# EAGLE board nixie - final (EAGLE 7.7.0)
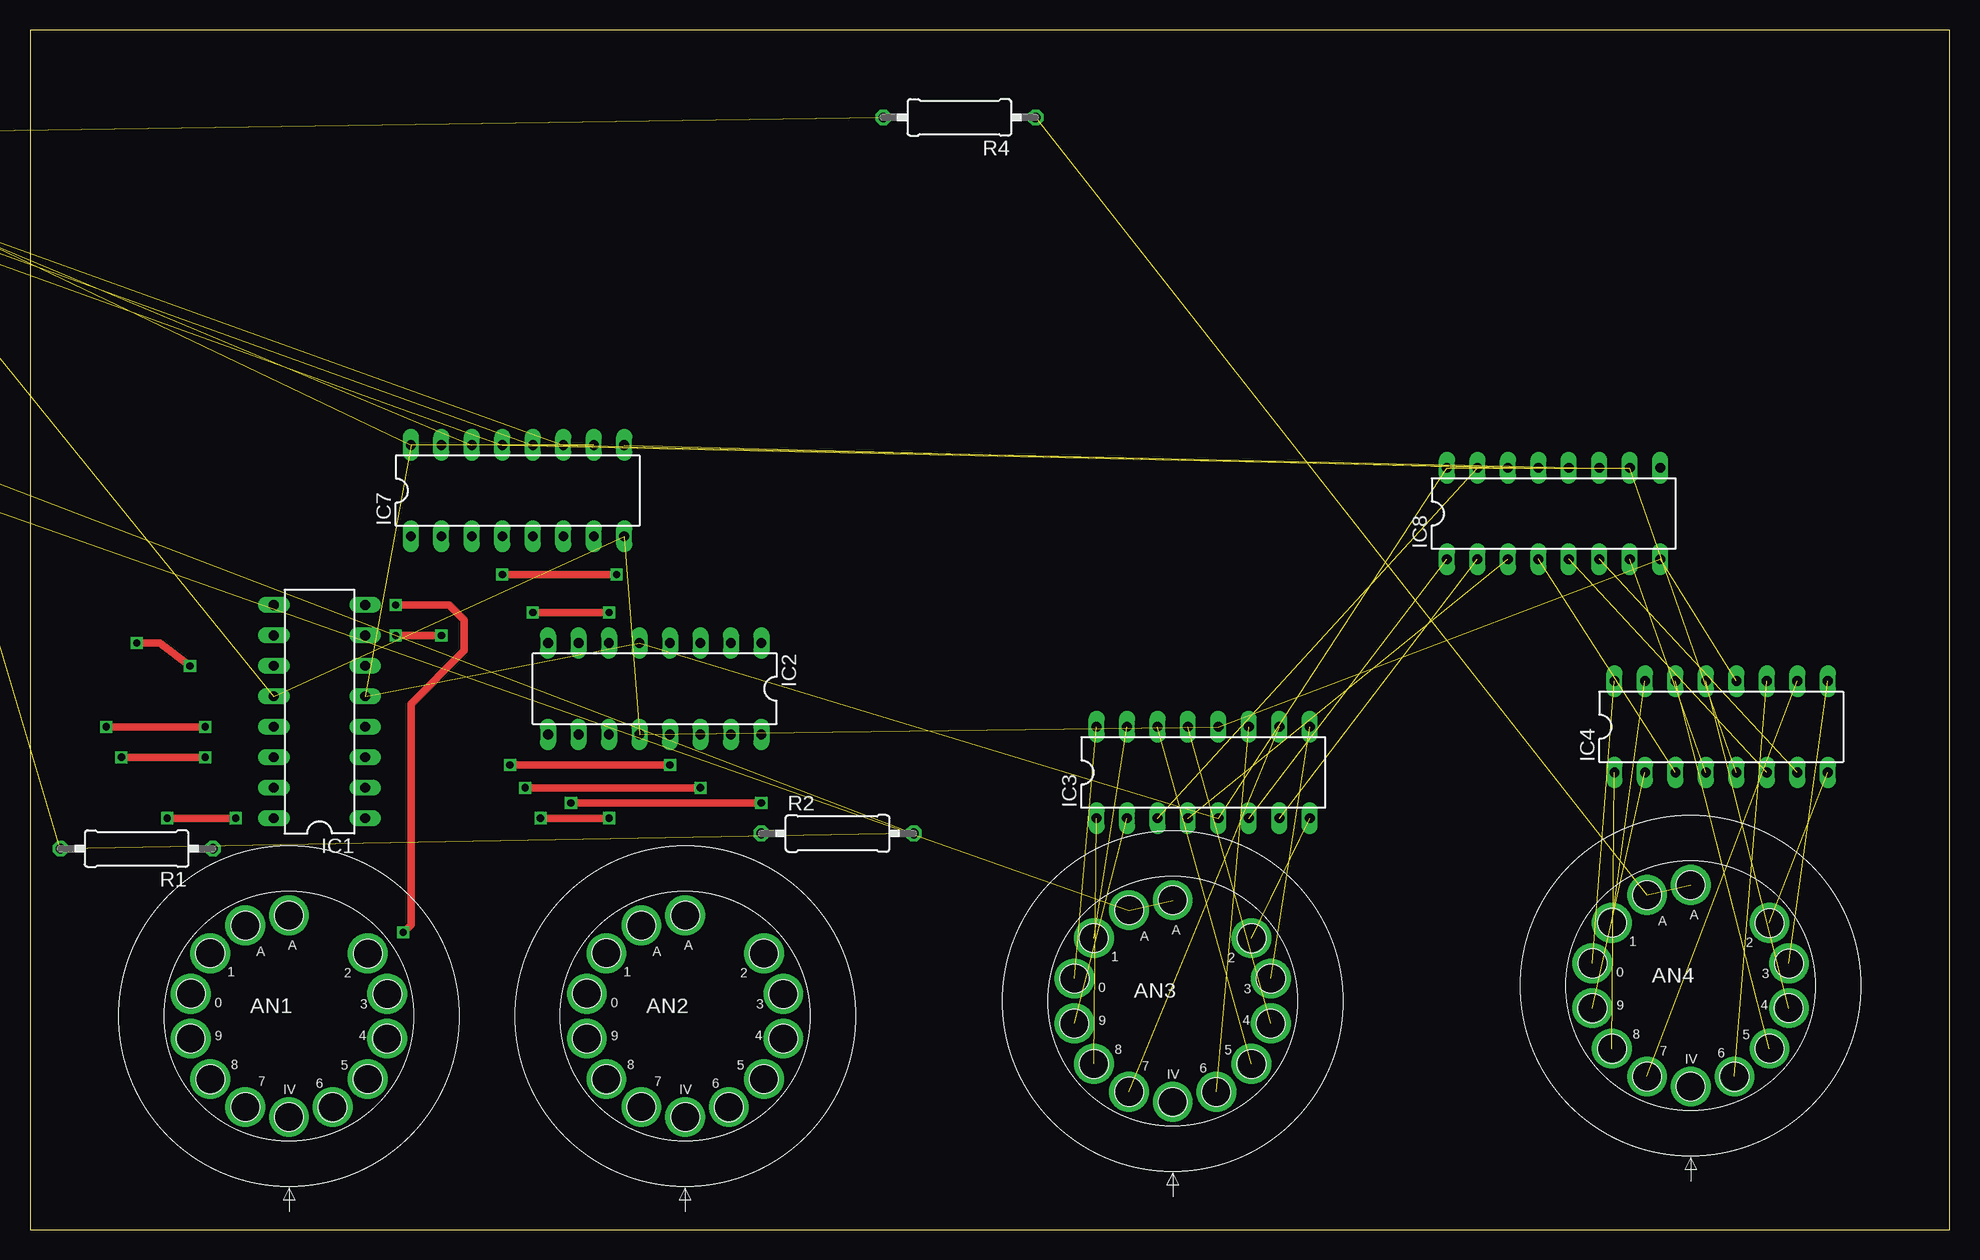
[diagram p0: board, top side]
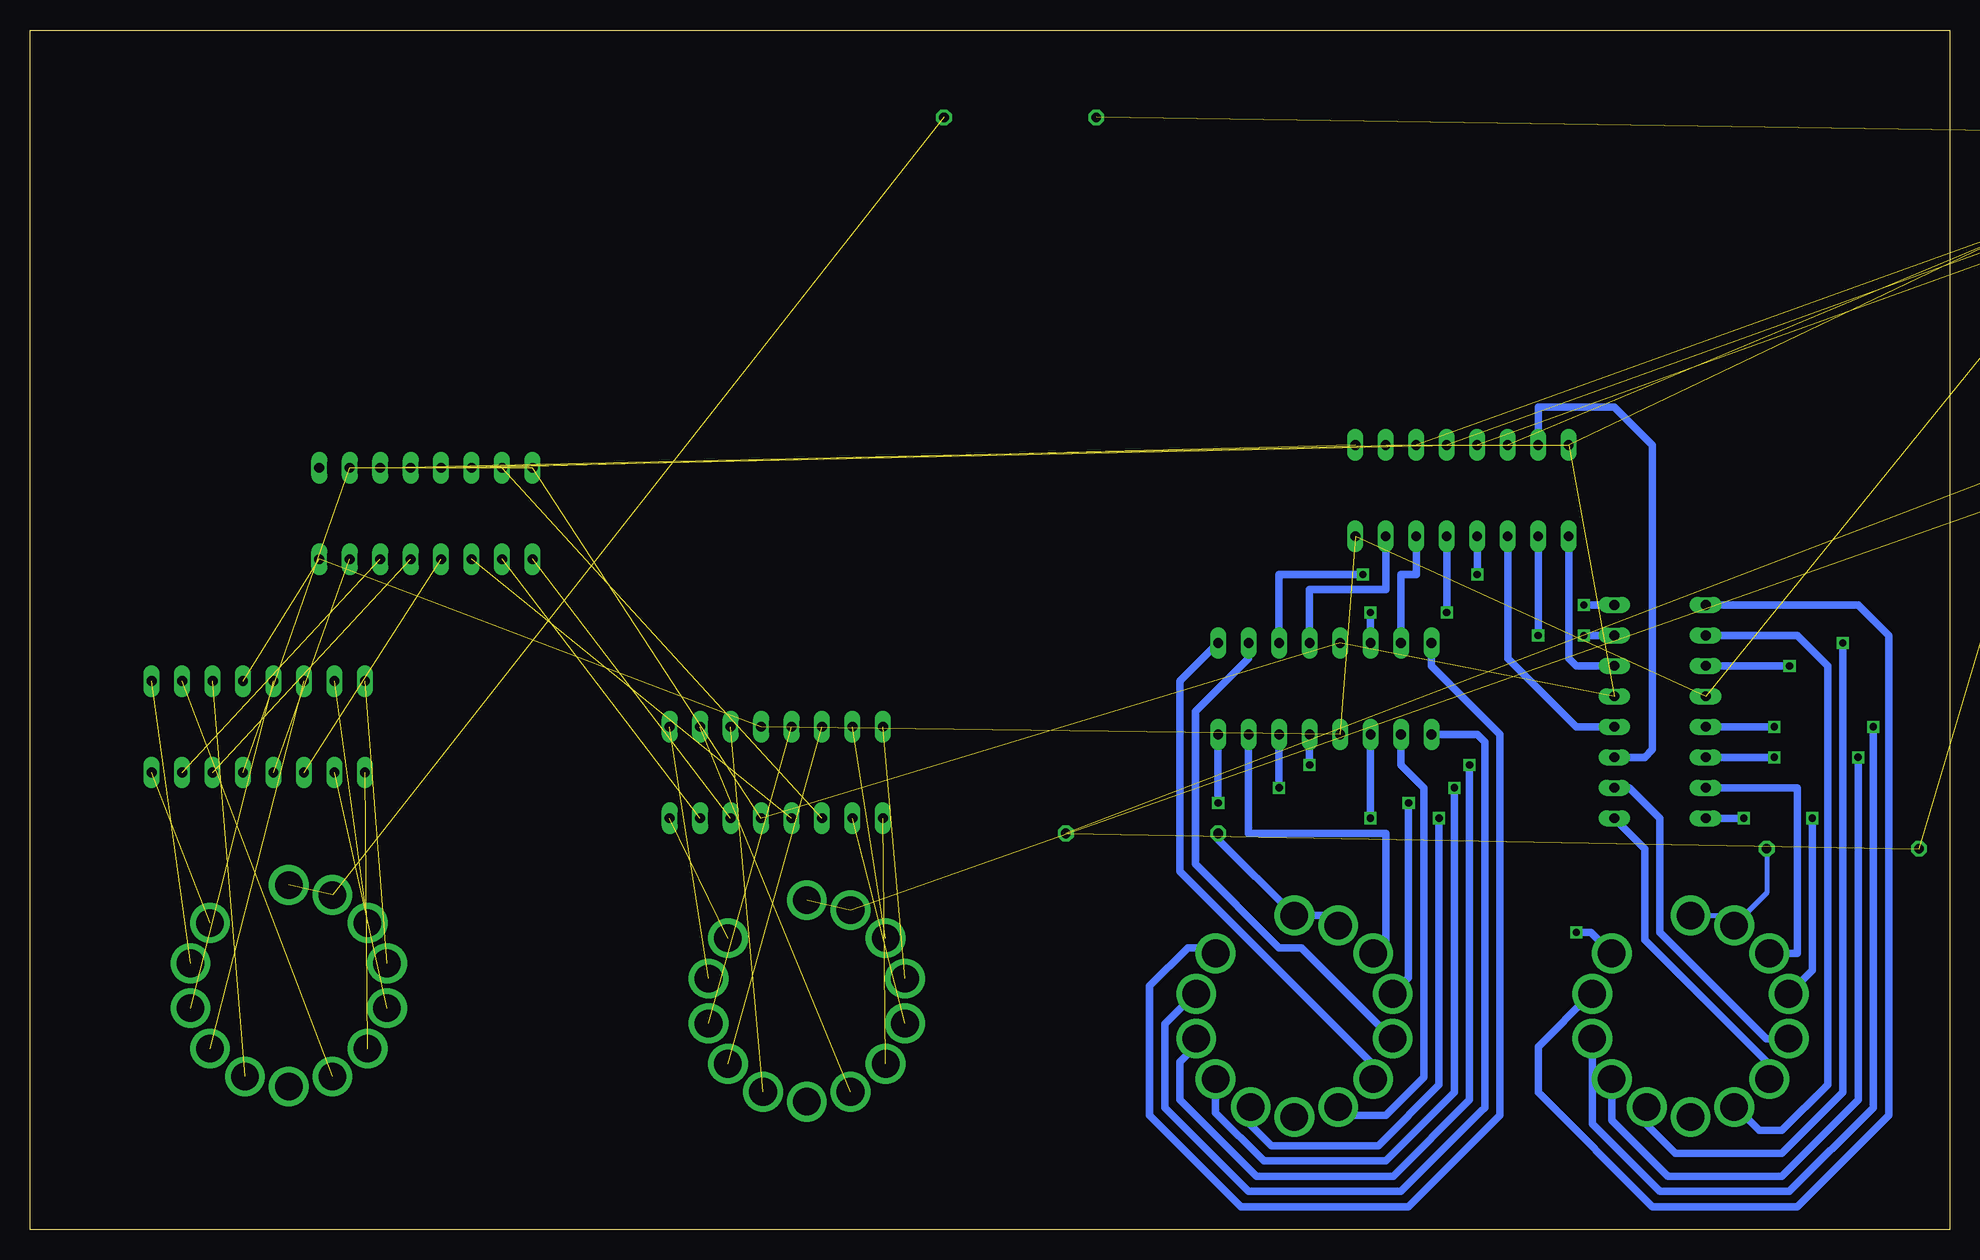
[diagram p1: board, bottom side, seen from below]

Size 160 x 100 mm. Coordinates in mm from the lower left corner, seen from the top.
Outline: 0,0 160,0 160,100 0,100 0,0
Copper layers (1*16): Top 0.035mm / dielectric 1.5mm / Bottom 0.035mm
Design rules "default": minimum track width 10mil, minimum drill 24mil, track to track 8mil, track to pad 8mil, pad to pad 8mil, via to via 8mil, smd to smd 8mil, copper to edge 40mil, drill to drill 8mil, minimum pad ring 10mil, minimum via ring 8mil, stop-mask expansion 4mil, vias tented up to drill 0mil, thermal gap 10mil

## Footprints (pad centres in the part's own frame; a part is rotated, then mirrored left to right if it is on the bottom)
ZM1042-AMP = drill 2.3 pad 3.2: 0 -8.189,1.869; 1 -6.567,5.237; 2 6.567,5.237; 3 8.189,1.869; 4 8.189,-1.869; 5 6.567,-5.237; 6 3.645,-7.568; 7 -3.645,-7.568; 8 -6.567,-5.237; 9 -8.189,-1.869; A 0,8.4; A1 -3.645,7.568; IV 0,-8.4
DIL16 = drill 0.813 long: 1 -8.89,-3.81; 2 -6.35,-3.81; 3 -3.81,-3.81; 4 -1.27,-3.81; 5 1.27,-3.81; 6 3.81,-3.81; 7 6.35,-3.81; 8 8.89,-3.81; 9 8.89,3.81; 10 6.35,3.81; 11 3.81,3.81; 12 1.27,3.81; 13 -1.27,3.81; 14 -3.81,3.81; 15 -6.35,3.81; 16 -8.89,3.81
LED_LD260 = drill 0.813 octagon: A -1.27,0; K 1.27,0
0309/12 = drill 0.813 octagon: 1 -6.35,0; 2 6.35,0
MA10-1 = drill 1.016 long: 1 -11.43,0; 2 -8.89,0; 3 -6.35,0; 4 -3.81,0; 5 -1.27,0; 6 1.27,0; 7 3.81,0; 8 6.35,0; 9 8.89,0; 10 11.43,0

## Placement (x,y rotation side)
AN1  ZM1042-1-380758-1  [ZM1042-AMP]  21.59,17.78 0 top
AN2  ZM1042-1-380758-1  [ZM1042-AMP]  54.61,17.78 0 top
AN3  ZM1042-1-380758-1  [ZM1042-AMP]  95.25,19.05 0 top
AN4  ZM1042-1-380758-1  [ZM1042-AMP]  138.43,20.32 0 top
IC1  74141N  [DIL16]  24.13,43.18 90 top
IC2  74141N  [DIL16]  52.07,45.09 180 top
IC3  74141N  [DIL16]  97.79,38.1 0 top
IC4  74141N  [DIL16]  140.97,41.91 0 top
IC7  74HC595N  [DIL16]  40.64,61.59 0 top
IC8  74HC595N  [DIL16]  127,59.69 0 top
LED1  [LED_LD260]  -30.48,96.52 0 top  (outside the outline)
LED2  [LED_LD260]  -35.56,96.52 0 top  (outside the outline)
R1  27k  [0309/12]  8.89,31.75 180 top
R2  27k  [0309/12]  67.31,33.02 0 top
R3  27k  [0309/12]  -78.74,88.9 0 top  (outside the outline)
R4  27k  [0309/12]  77.47,92.71 180 top
SV1  [MA10-1]  -26.67,91.44 0 top  (outside the outline)

## Library data of the parts
AN1-AN4 = nixie_tube
IC1-IC4 IC7 IC8 = 74xx-eu
LED1 LED2 = eagle-ltspice; SPICEMODEL: NONE; SPICEPREFIX: D; SPICETYPE: diode
R1-R4 = resistor
SV1 = con-lstb; OC_FARNELL: unknown; OC_NEWARK: unknown

## Nets
230V=: R1.2 R2.2 R3.2 R4.2 SV1.10
GND: IC1.12 IC2.12 IC3.12 IC4.12 IC7.8 IC8.8 LED1.K LED2.K SV1.8 SV1.9
LED1: LED2.A SV1.1
LED2: LED1.A SV1.2
N$1: AN1.0 IC1.16
N$2: AN1.1 IC1.15
N$3: AN1.2 IC1.8
N$4: AN1.3 IC1.9
N$5: AN1.4 IC1.13
N$6: AN1.5 IC1.14
N$7: AN1.6 IC1.11
N$8: AN1.7 IC1.10
N$9: AN1.8 IC1.1
N$10: AN1.9 IC1.2
N$11: AN4.1 IC4.15
N$12: AN4.2 IC4.8
N$13: AN4.4 IC4.13
N$14: AN4.3 IC4.9
N$15: AN4.5 IC4.14
N$16: AN4.6 IC4.11
N$17: AN4.7 IC4.10
N$18: AN4.8 IC4.1
N$19: AN4.9 IC4.2
N$20: AN4.0 IC4.16
N$21: AN3.1 IC3.15
N$22: AN3.2 IC3.8
N$23: AN3.4 IC3.13
N$24: AN3.3 IC3.9
N$25: AN3.5 IC3.14
N$26: AN3.6 IC3.11
N$27: AN3.7 IC3.10
N$28: AN3.8 IC3.1
N$29: AN3.9 IC3.2
N$30: AN3.0 IC3.16
N$31: AN2.1 IC2.15
N$32: AN2.2 IC2.8
N$33: AN2.4 IC2.13
N$34: AN2.3 IC2.9
N$35: AN2.5 IC2.14
N$36: AN2.6 IC2.11
N$37: AN2.7 IC2.10
N$38: AN2.8 IC2.1
N$39: AN2.9 IC2.2
N$40: AN2.0 IC2.16
N$61: IC1.3 IC7.15
N$62: IC1.6 IC7.1
N$63: IC1.7 IC7.2
N$64: IC1.4 IC7.3
N$65: IC2.3 IC7.4
N$66: IC2.6 IC7.5
N$67: IC2.7 IC7.6
N$68: IC2.4 IC7.7
N$69: IC3.3 IC8.15
N$70: IC3.6 IC8.1
N$71: IC3.7 IC8.2
N$72: IC3.4 IC8.3
N$73: IC4.3 IC8.4
N$74: IC4.6 IC8.5
N$75: IC4.7 IC8.6
N$76: IC4.4 IC8.7
N$85: IC7.9 IC8.14
N$89: AN1.A AN1.A1 R1.1
N$90: AN2.A AN2.A1 R2.1
N$91: AN3.A AN3.A1 R3.1
N$92: AN4.A AN4.A1 R4.1
OUTPUT_ON(LOW): IC7.13 IC8.13 SV1.3
REGISTER_WRITE: IC7.12 IC8.12 SV1.4
SERIAL_IN: IC7.14 SV1.6
SERIAL_MOVE_CLOCK: IC7.11 IC8.11 SV1.5
VCC: IC1.5 IC2.5 IC3.5 IC4.5 IC7.10 IC7.16 IC8.10 IC8.16 SV1.7

## Tracks (layer width: path | path; a pad name or v marks a point on that pad's centre or on a via)
230V=  (4 unrouted)
GND  (9 unrouted)
LED1  (1 unrouted)
LED2  (1 unrouted)
N$1  (via drill 0.6)
  Top 0.61: v11.43,34.29 v17.14,34.29
  Bottom 0.61: AN1.0 11.43,21.62 v11.43,34.29 | v17.14,34.29 IC1.16
N$2
  Bottom 0.61: AN1.1 12.7,23.02 12.7,36.83 IC1.15
N$3  (via drill 0.6)
  Top 0.61: v30.48,52.07 34.92,52.07 36.2,50.8 36.2,48.26 31.75,43.81 31.75,25.4 v31.11,24.77
  Bottom 0.61: IC1.8 v30.48,52.07 | v31.11,24.77 29.91,24.77 AN1.2
N$4
  Bottom 0.61: AN1.3 29.88,19.65 34.29,15.24 34.29,11.43 24.77,1.91 12.7,1.91 5.08,9.53 5.08,49.53 7.62,52.07 IC1.9
N$5  (via drill 0.6)
  Top 0.61: v6.35,41.91 v14.61,41.91
  Bottom 0.61: AN1.4 29.78,8.82 24.13,3.17 13.34,3.17 6.35,10.16 v6.35,41.91 | v14.61,41.91 IC1.13
N$6  (via drill 0.6)
  Top 0.61: v7.62,39.37 v14.61,39.37
  Bottom 0.61: AN1.5 28.16,9.11 23.5,4.45 13.97,4.45 7.62,10.79 v7.62,39.37 | v14.61,39.37 IC1.14
N$7  (via drill 0.6)
  Top 0.61: v8.89,48.9 10.79,48.9 v13.34,46.99
  Bottom 0.61: AN1.6 25.23,8.72 22.86,6.35 13.97,6.35 8.89,11.43 v8.89,48.9 | v13.34,46.99 IC1.11
N$8
  Bottom 0.61: AN1.7 17.83,10.21 15.88,8.26 13.97,8.26 10.16,12.06 10.16,46.99 12.7,49.53 IC1.10
N$9
  Bottom 0.61: AN1.8 15.02,13.75 25.4,24.13 25.4,31.75 IC1.1
N$10
  Bottom 0.61: AN1.9 15.28,15.91 24.13,24.77 24.13,34.29 26.67,36.83 IC1.2
N$11  (1 unrouted)
N$12  (1 unrouted)
N$13  (1 unrouted)
N$14  (1 unrouted)
N$15  (1 unrouted)
N$16  (1 unrouted)
N$17  (1 unrouted)
N$18  (1 unrouted)
N$19  (1 unrouted)
N$20  (1 unrouted)
N$21  (1 unrouted)
N$22  (1 unrouted)
N$23  (1 unrouted)
N$24  (1 unrouted)
N$25  (1 unrouted)
N$26  (1 unrouted)
N$27  (1 unrouted)
N$28  (1 unrouted)
N$29  (1 unrouted)
N$30  (1 unrouted)
N$31
  Bottom 0.61: IC2.15 58.42,33.02 46.99,33.02 46.99,24.07 AN2.1
N$32
  Bottom 0.61: IC2.8 43.18,46.99 37.47,41.27 37.47,9.53 45.09,1.91 59.05,1.91 66.67,9.53 66.67,20.32 63.5,23.5 61.66,23.5 AN2.2
N$33  (via drill 0.6)
  Top 0.61: v40.01,38.73 v53.34,38.73
  Bottom 0.61: AN2.4 62.8,15.31 64.14,13.97 64.14,10.79 57.78,4.45 46.35,4.45 40.01,10.79 v40.01,38.73 | v53.34,38.73 IC2.13
N$34
  Bottom 0.61: AN2.3 62.9,19.65 65.41,17.14 65.41,10.16 58.42,3.17 45.72,3.17 39.05,9.84 38.73,10.16 38.73,40.64 39.37,41.27 IC2.9
N$35  (via drill 0.6)
  Top 0.61: v41.27,36.83 v55.88,36.83
  Bottom 0.61: AN2.5 61.18,9.74 57.15,5.71 46.99,5.71 41.27,11.43 v41.27,36.83 | v55.88,36.83 IC2.14
N$36  (via drill 0.6)
  Top 0.61: v42.55,34.29 v48.26,34.29
  Bottom 0.61: AN2.6 58.26,8.72 56.52,6.99 47.62,6.99 42.55,12.06 v42.55,34.29 | v48.26,34.29 IC2.11
N$37
  Bottom 0.61: AN2.7 50.28,9.53 46.99,9.53 43.81,12.7 43.81,36.83 45.72,38.73 IC2.10
N$38
  Bottom 0.61: AN2.8 48.04,13.75 64.14,29.84 64.14,45.72 IC2.1
N$39
  Bottom 0.61: AN2.9 54.01,23.5 55.88,23.5 62.87,30.48 62.87,43.18 58.42,47.62 IC2.2
N$40  (via drill 0.6)
  Top 0.61: v45.09,35.56 v60.96,35.56
  Bottom 0.61: AN2.0 45.09,20.98 v45.09,35.56 | v60.96,35.56 IC2.16
N$61
  Bottom 0.61: IC1.3 25.4,39.37 24.77,40.01 24.77,65.41 27.94,68.58 34.29,68.58 IC7.15
N$62
  Bottom 0.61: IC7.1 31.75,47.62 31.11,46.99 IC1.6
N$63  (via drill 0.6)
  Top 0.61: v34.29,49.53 v30.48,49.53
  Bottom 0.61: IC7.2 v34.29,49.53 | v30.48,49.53 IC1.7
N$64
  Bottom 0.61: IC7.3 36.83,47.62 31.11,41.91 IC1.4
N$65  (via drill 0.6)
  Top 0.61: v48.9,54.61 v39.37,54.61
  Bottom 0.61: IC2.3 55.88,54.61 v48.9,54.61 | v39.37,54.61 IC7.4
N$66  (via drill 0.6)
  Top 0.61: v48.26,51.44 v41.91,51.44
  Bottom 0.61: IC2.6 v48.26,51.44 | v41.91,51.44 IC7.5
N$67
  Bottom 0.61: IC7.6 44.45,54.61 45.72,54.61 IC2.7
N$68
  Bottom 0.61: IC2.4 53.34,53.34 46.99,53.34 IC7.7
N$69  (1 unrouted)
N$70  (1 unrouted)
N$71  (1 unrouted)
N$72  (1 unrouted)
N$73  (1 unrouted)
N$74  (1 unrouted)
N$75  (1 unrouted)
N$76  (1 unrouted)
N$85  (1 unrouted)
N$89
  Bottom 0.406: R1.1 15.24,28.05 AN1.A1 18.78,26.18 AN1.A
N$90
  Bottom 0.61: R2.1 60.96,32.53 AN2.A 50.95,26.18 50.16,25.4 50.91,25.4 AN2.A1
N$91  (2 unrouted)
N$92  (2 unrouted)
OUTPUT_ON(LOW)  (2 unrouted)
REGISTER_WRITE  (2 unrouted)
SERIAL_IN  (1 unrouted)
SERIAL_MOVE_CLOCK  (2 unrouted)
VCC  (8 unrouted)